# Altium PCB PCB_Wattimetro.PcbDoc
Units mm, origin at the board's own origin, x right, y up, seen from the top; angles counter-clockwise.
Board outline 89.41 x 101.09 mm, 2 copper layers (Top Layer, Bottom Layer); 27 components, 22 nets, 125 pads, 0 vias.
Unrouted connection lines stored in the file: 6.
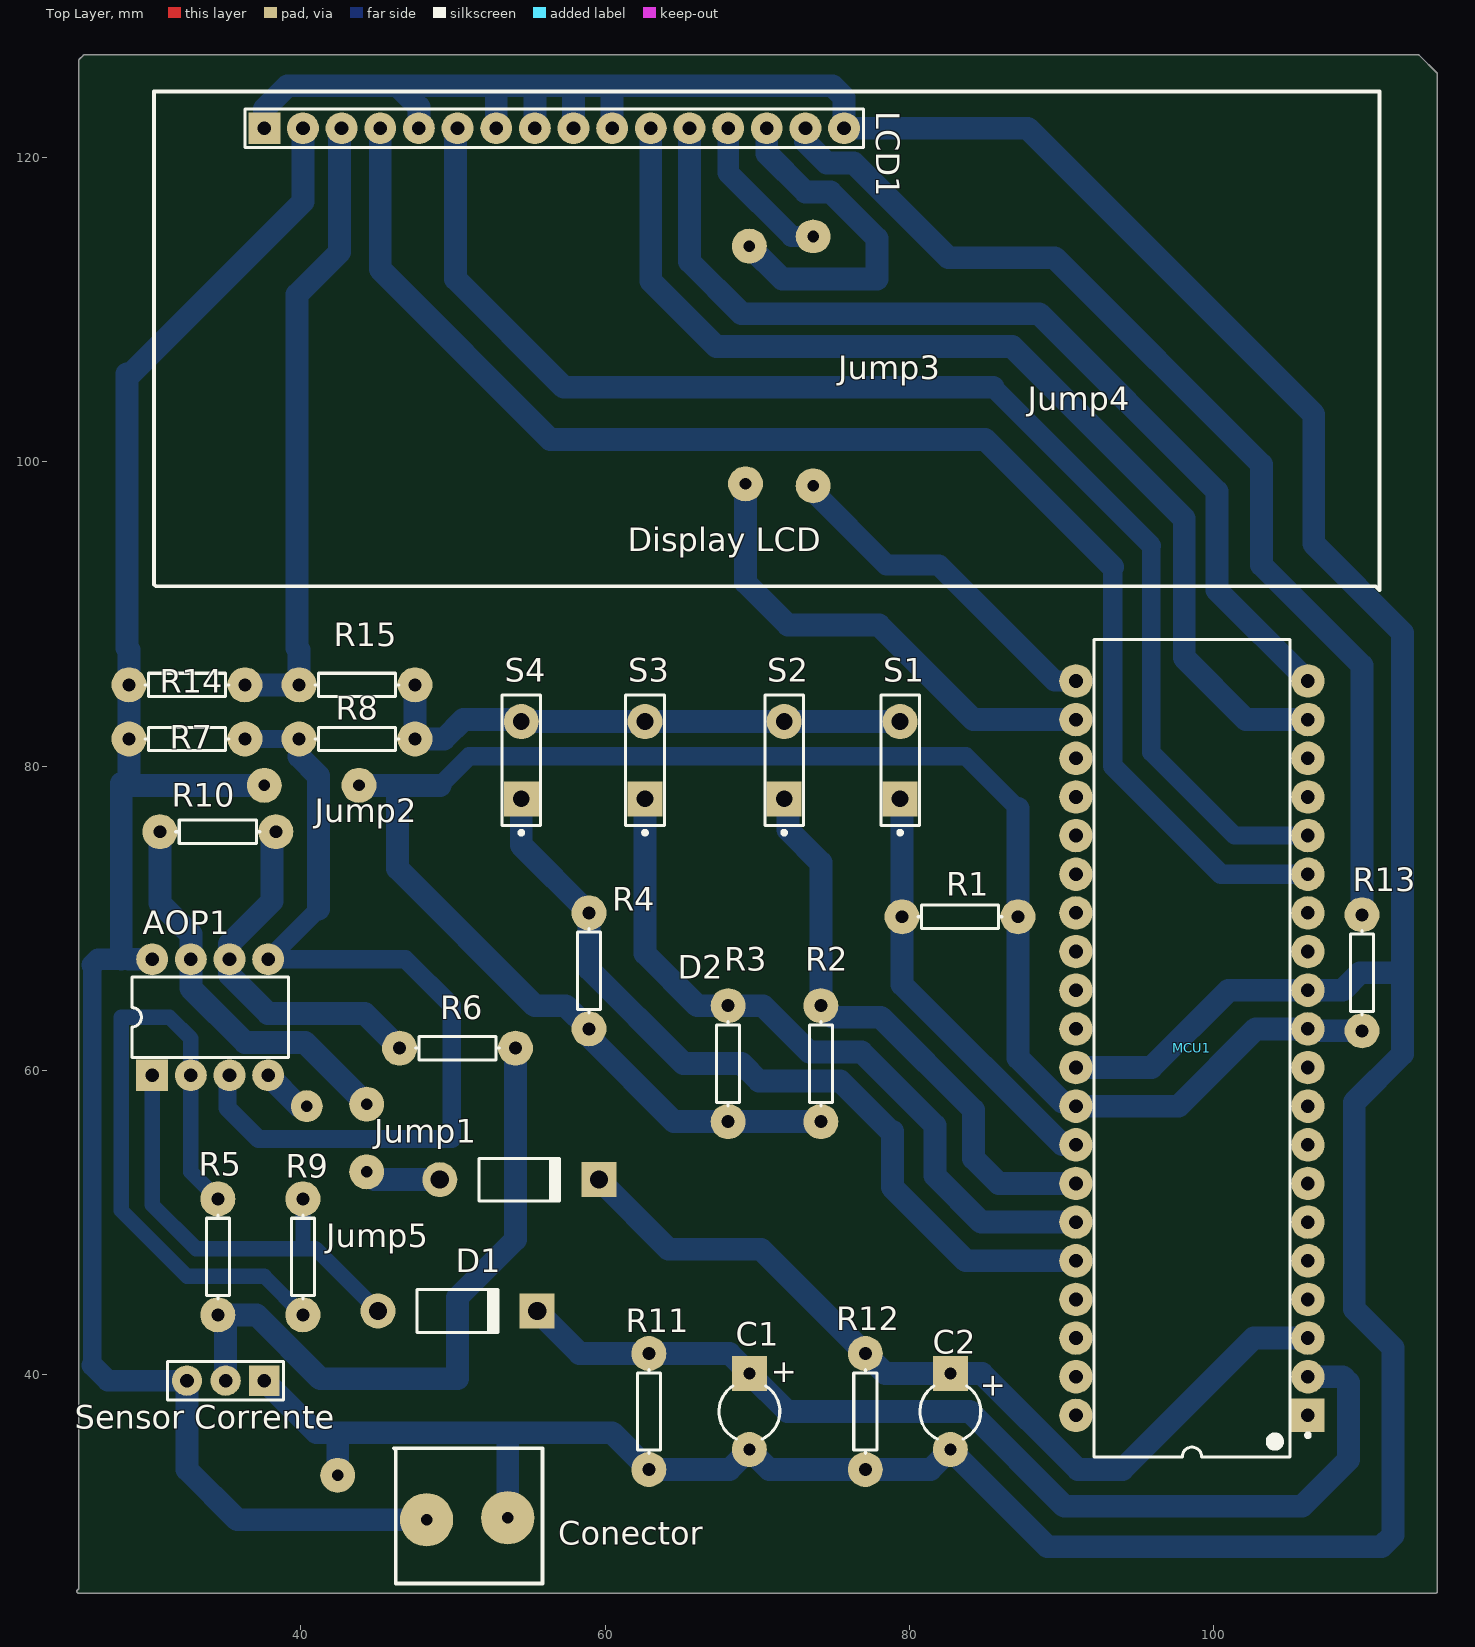
[diagram p0: Top Layer view]
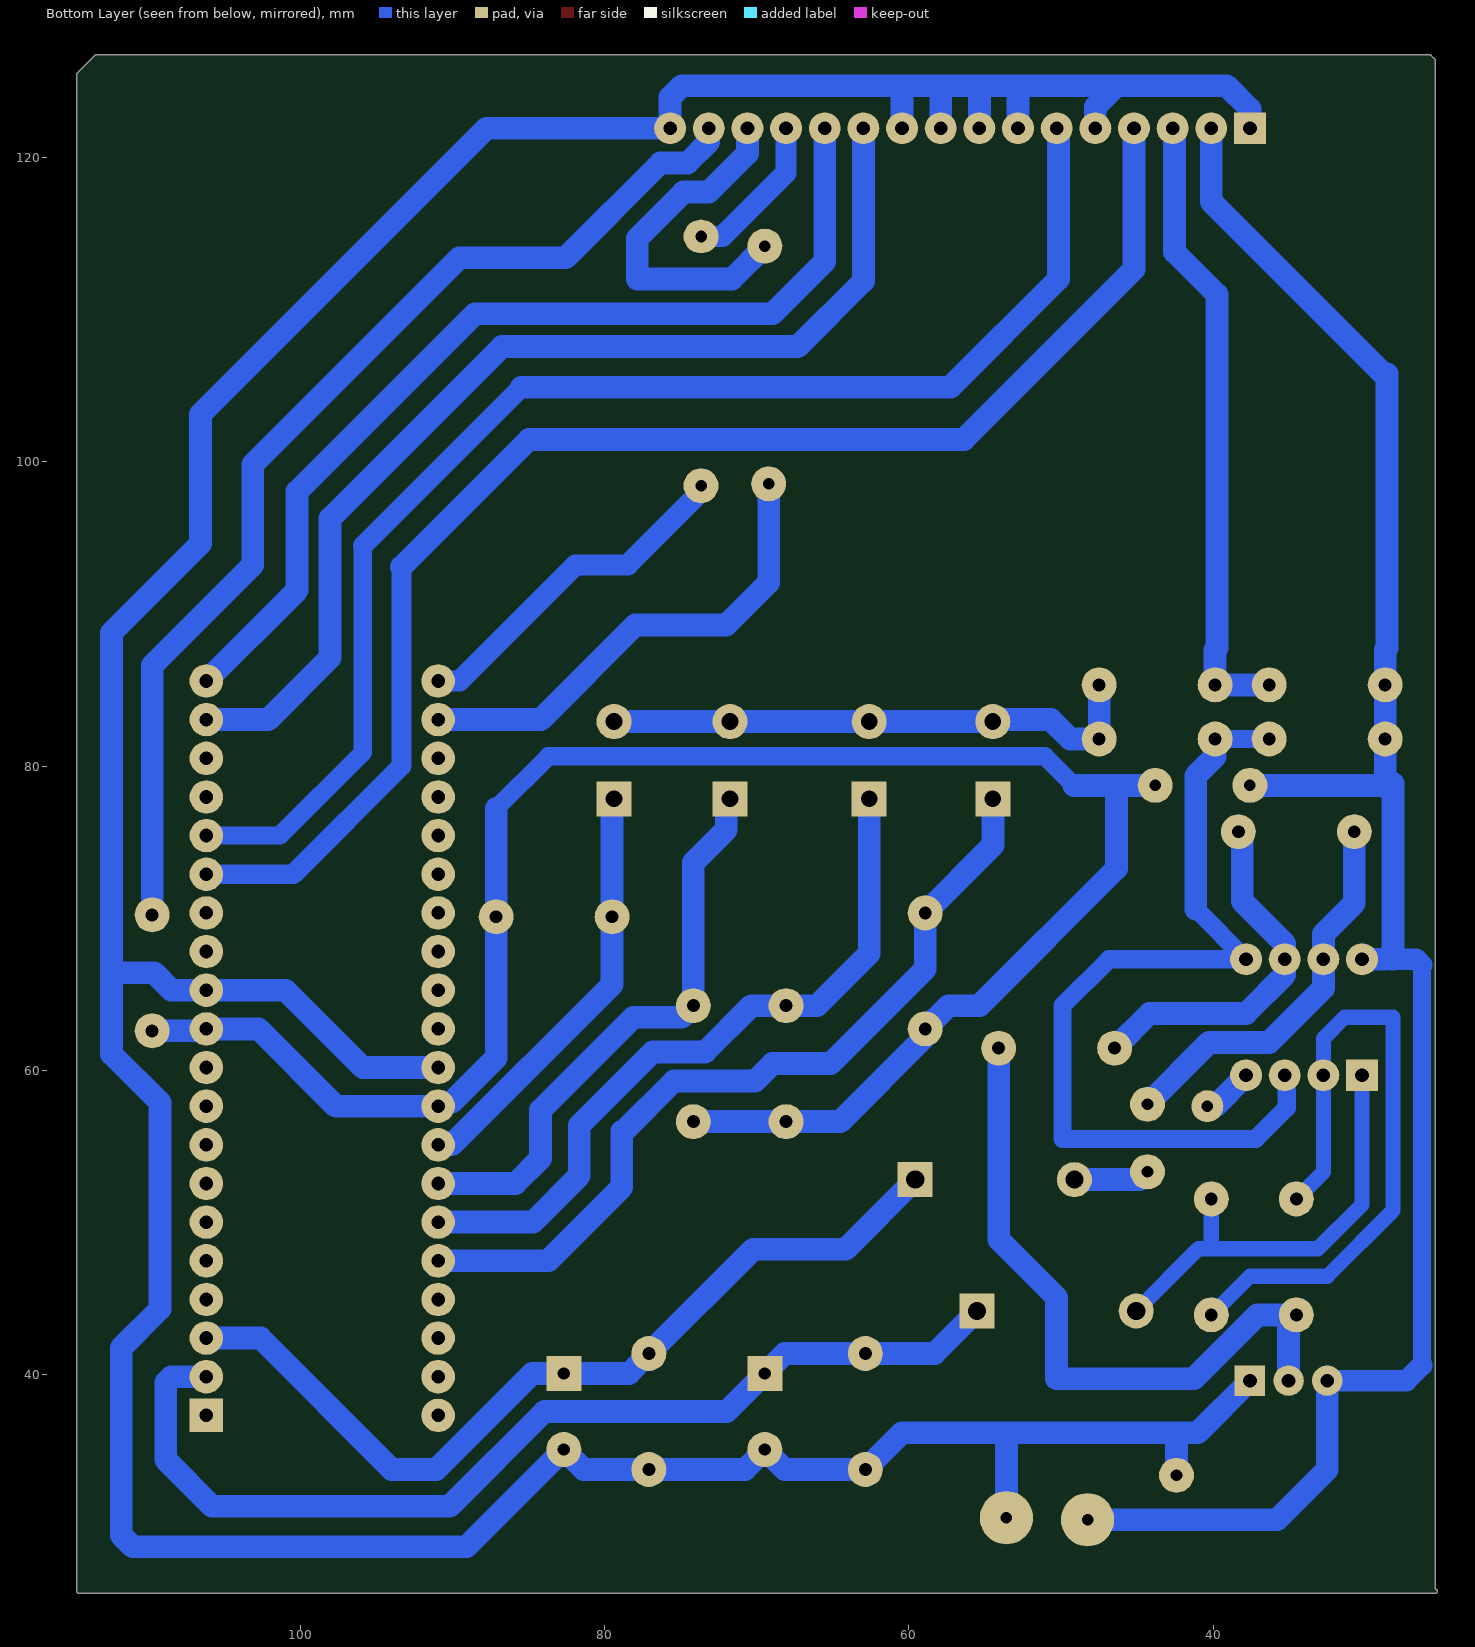
[diagram p1: Bottom Layer view, seen from below]

## Layer stack, top to bottom
Top Layer: signal copper 0.0356
Dielectric: dielectric 0.32, FR-4, Dk 4.8
Bottom Layer: signal copper 0.0356

## Board outline
25.4,25.908 25.4,126.365 cw(c25.527,126.365) 25.437,126.456 25.437,126.455 25.691,126.709 25.69,126.709 cw(c25.781,126.619) 25.781,126.746 113.411,126.746 cw(c113.411,126.619) 113.502,126.709 113.501,126.709 114.644,125.566 114.644,125.567 cw(c114.554,125.476) 114.681,125.476 114.681,25.781 cw(c114.554,25.781) 114.554,25.654 25.4,25.654 cw(c25.4,25.781)

## Design rules (kind name [scope] priority, off if disabled: settings)
Clearance [All] p1: gap=0.254
PolygonConnect [All] p1: connectstyle=Relief reliefconductorwidth=0.254 reliefentries=4 polygonreliefangle="90 Angle"
RoutingLayers [All] p1: top layer_v5=FALSE bottom layer_v5=TRUE
RoutingVias [All] p1: holewidth=0.711 width=1.27 viastyle="Through Hole" minholewidth=0.711 minwidth=1.27 maxholewidth=0.711 maxwidth=1.27
SolderMaskExpansion [All] p1: expansion=0.102
TestPointUsage [All] p1: valid=0 allowmultiple=FALSE
Testpoint [All] p1: side=15 testpointundercomponent=TRUE minsize=1.016 maxsize=2.54 preferedsize=1.524 minholesize=0 maxholesize=1.016 preferedholesize=0.813 testpointgrid=0.025 style=1023 order=0-112345678
Width [All] p1: maxlimit=5 minlimit=0.254 preferedwidth=0.254 toplayer_maxwidth=0.254 minimp=50.000000 maximp=50.000000 favimp=50.000000
18 further rules are at their usual default settings.

## Components (designator, comment, footprint, x,y, rotation, side; value= is the part's Value field where it differs from the comment)
AOP1 "LM358N" 626-05 34.036,63.5 r0 top
C1 "Cap1" CAPR5-4X5 69.469,37.592 r270 top
C2 "Cap2" CAPR5-4X5 82.677,37.592 r270 top
D1 "Diode 1N4007" DO-41 50.292,44.196 r0 top
D2 "Diode 1N4007" DO-41 54.356,52.832 r0 top
LCD1 "Header 16" HDR1X16 37.592,121.92 r0 top
MCU1 "PIC18F4520-I/P" PDIP600-P40 98.552,61.468 r180 top
R1 "Res1" AXIAL-0.3 83.312,70.104 r0 top
R2 "Res2" AXIAL-0.3 74.168,60.452 r270 top
R3 "Res3" AXIAL-0.3 68.072,60.452 r270 top
R4 "Res4" AXIAL-0.3 58.928,66.548 r270 top
R5 "Res5" AXIAL-0.3 34.544,47.752 r90 top
R6 "Res6" AXIAL-0.3 50.292,61.468 r180 top
R7 "Res7" AXIAL-0.3 32.512,81.788 r180 top
R8 "Res8" AXIAL-0.3 43.688,81.788 r180 top
R9 "Res9" AXIAL-0.3 40.132,47.752 r90 top
R10 "Res10" AXIAL-0.3 34.544,75.692 r0 top
R11 "Res11" AXIAL-0.3 62.865,37.592 r90 top
R12 "Res12" AXIAL-0.3 77.089,37.592 r90 top
R13 "Res13" AXIAL-0.3 109.728,66.421 r90 top
R14 "Res14" AXIAL-0.3 32.512,85.344 r180 top
R15 "Res15" AXIAL-0.3 43.688,85.344 r180 top
S1 "SW-PB1" SPST-2 79.375,80.391 r90 top
S2 "SW-PB2" SPST-2 71.755,80.391 r90 top
S3 "SW-PB3" SPST-2 62.611,80.391 r90 top
S4 "SW-PB4" SPST-2 54.483,80.391 r90 top
"Sensor Corrente" "Header 3" HDR1X3 37.592,39.624 r180 top

## Footprints (in the part's own frame and the unit in brackets; to place one, negate y for a bottom-side part, rotate by r counter-clockwise, add the part's x,y. Pads: shape width x height; smd on the part's side, far side on the other; paste and mask are expansions set on the pad)
626-05 [mm] "DIP; 8 Leads; Row Spacing 7.62 mm; Pitch 2.54 mm"
  rect 2.1x2.1 hole 0.9: 1(-3.81,-3.81)
  round 2.1 hole 0.9: 2(-1.27,-3.81) 3(1.27,-3.81) 4(3.81,-3.81) 5(3.81,3.81) 6(1.27,3.81) 7(-1.27,3.81) 8(-3.81,3.81)
  silkscreen extent -5.15,-2.65 5.15,2.65
AXIAL-0.3 [mm] "Resistor; 2 Leads"
  round 2.3 hole 0.85: 1(-3.81,0) 2(3.81,0)
  silkscreen extent -2.77,-0.76 2.77,0.76
CAPR5-4X5 [mm] "Capacitor; 2 Leads"
  rect 2.3x2.3 hole 0.8: 1(-2.5,0)
  round 2.3 hole 0.8: 2(2.5,0)
  silkscreen extent -1.69,-2 1.82,2
DO-41 [mm] "Diode, Axial; Body 5.2 x 2.7 mm (LxDia. max), Lead Dia. 0.86 mm (max)"
  round 2.3 hole 1.2: 1(-5.23,0)
  rect 2.3x2.3 hole 1.2: 2(5.23,0)
  silkscreen extent -2.65,-1.4 2.75,1.42
HDR1X3 [mm] "Connector; Header; 3 Position"
  rect 2x2 hole 0.9: 1(0,0)
  round 2 hole 0.9: 2(2.54,0) 3(5.08,0)
  silkscreen extent -1.27,-1.27 6.35,1.27
HDR1X16 [mm] "Connector; Header; 16 Position"
  rect 2.1x2.1 hole 0.9: 1(0,0)
  round 2.1 hole 0.9: 2(2.54,0) 3(5.08,0) 4(7.62,0) 5(10.16,0) 6(12.7,0) 7(15.24,0) 8(17.78,0) 9(20.32,0) 10(22.86,0) 11(25.4,0) 12(27.94,0) 13(30.48,0) 14(33.02,0) 15(35.56,0) 16(38.1,0)
  silkscreen extent -1.27,-1.27 39.37,1.27
PDIP600-P40 [mm] "DIP, 40-Leads, Row Spacing 15.24mm, Pitch 2.54mm, Body 51.8x13.5mm"
  rect 2.2x2.2 hole 0.9: 1(-7.62,24.13)
  round 2.2 hole 0.9: 2(-7.62,21.59) 3(-7.62,19.05) 4(-7.62,16.51) 5(-7.62,13.97) 6(-7.62,11.43) 7(-7.62,8.89) 8(-7.62,6.35) 9(-7.62,3.81) 10(-7.62,1.27) 11(-7.62,-1.27) 12(-7.62,-3.81) 13(-7.62,-6.35) 14(-7.62,-8.89) 15(-7.62,-11.43) 16(-7.62,-13.97) 17(-7.62,-16.51) 18(-7.62,-19.05) 19(-7.62,-21.59) 20(-7.62,-24.13) 21(7.62,-24.13) 22(7.62,-21.59) 23(7.62,-19.05) 24(7.62,-16.51) 25(7.62,-13.97) 26(7.62,-11.43) 27(7.62,-8.89) 28(7.62,-6.35) 29(7.62,-3.81) 30(7.62,-1.27) 31(7.62,1.27) 32(7.62,3.81) 33(7.62,6.35) 34(7.62,8.89) 35(7.62,11.43) 36(7.62,13.97) 37(7.62,16.51) 38(7.62,19.05) 39(7.62,21.59) 40(7.62,24.13)
  silkscreen extent -7.75,-26.85 6.45,26.85, body extent -7.3,-26.85 7.3,26.85, height 6.35
SPST-2 [mm] "Circuit Breaker; 2 Leads"
  rect 2.3x2.3 hole 1.1: 1(-2.54,0)
  round 2.3 hole 1.1: 2(2.54,0)
  silkscreen extent -4.89,-1.27 4.28,1.27

## Part data
AOP1: "Dual Low-Power Operational Amplifier"
C1 C2: library part "Cap Pol1", "Polarized Capacitor (Radial)"
D1 D2: library part Diode, "Default Diode"
LCD1: "Header, 16-Pin"
MCU1: "Enhanced Flash Microcontroller with 10-Bit A/D and nanoWatt Technology, 32K Flash, 40-Pin PDIP, Industrial Temperature Range"
R1: "Resistor"
R2 R3 R4 R5 R6 R7 R8 R9 R10 R11 R12 R13 R14 R15: library part Res1, "Resistor"
S1 S2 S3 S4: library part SW-PB, "Switch"
"Sensor Corrente": "Header, 3-Pin"

## Free pads (board coordinates)
  round 3.5 hole 0.762: 12(48.26,30.48) 13(53.594,30.607)
  round 2.3 hole 0.762: Jump1(44.323,53.34) Jump1(44.323,57.785) Jump2(37.592,78.74) Jump2(43.815,78.74) Jump3(69.215,98.552) Jump3(69.469,114.173) Jump4(73.66,98.425) Jump5(42.418,33.401)
  oval 2.3x2.2 hole 0.762: Jump4(73.66,114.808)
  round 2.1 hole 0.762: Jump5(40.386,57.658)

## Nets (pads, with @x,y where several pads share a name; then routed paths per layer and width w, separated by ;. In a path a pad name is that pad's centre, name@x,y a point inside that pad or via, vN(x,y) a via of type N, cw(c..) or ccw(c..) an arc to the next point about the centre after c; other vN are vias at no path point)
GND: "Sensor Corrente.1" AOP1.4 C1.2 C2.2 LCD1.1 LCD1.5 LCD1.7 LCD1.8 LCD1.9 LCD1.10 LCD1.16 MCU1.12 MCU1.31 pad.13 pad.Jump5 R8.1 R11.1 R12.1 R15.1 S1.2 S2.2 S3.2 S4.2 | length 328
  Bottom Layer w0.254: R8.1@47.498,82.804 47.625,82.931 ; LCD1.5@48.006,121.92 LCD1.5@48.26,121.666 ; 53.467,36.195 53.594,36.068 ; 86.106,121.92 86.36,121.92 ; MCU1.12@105.918,65.278 MCU1.12 MCU1.12@106.426,65.024
  Bottom Layer w1.5: 37.592,39.624 41.021,36.195 42.418,36.195 ; LCD1.1 37.592,123.19 39.116,124.714 46.355,124.714 ; AOP1.4 39.878,57.658 pad.Jump5@40.386,57.658 ; pad.Jump5@42.418,33.401 42.418,36.195 ; R15.1 R8.1 49.403,81.788 50.673,83.058 S4.2@54.229,83.058 ; LCD1.5 47.752,123.317 46.355,124.714 ; LCD1.7 52.832,124.587 52.705,124.714 ; pad.13 53.594,36.068 ; S4.2 S3.2 S2.2 S1.2 ; LCD1.8 55.372,124.587 55.499,124.714 ; LCD1.9 57.912,124.587 58.039,124.714 ; LCD1.10 60.452,124.714 ; 72.898,124.714 60.452,124.714 ; 73.152,124.714 74.93,124.714 75.692,123.952 LCD1.16 ; MCU1.31 95.885,60.198 100.965,65.278 MCU1.12 108.458,65.278 109.601,66.421 112.268,66.421 ; 42.418,36.195 53.467,36.195 60.452,36.195 R11.1 68.159,33.782 C1.2 70.779,33.782 R12.1 81.367,33.782 C2.2 89.067,28.702 110.998,28.702 111.76,29.464 111.76,41.783 109.22,44.323 109.22,57.912 112.395,61.087 112.395,88.773 106.553,94.615 106.553,103.124 87.757,121.92 86.36,121.92 LCD1.16@75.819,121.92 ; 46.355,124.714 52.705,124.714 ; 52.705,124.714 55.499,124.714 ; 55.499,124.714 58.039,124.714 ; 58.039,124.714 60.452,124.714 ; LCD1.16 LCD1.16@75.819,121.92 ; LCD1.16 LCD1.16@75.819,121.92
NetAOP1_1: AOP1.1 D1.1 R9.2 | length 29.4
  Bottom Layer w1: AOP1.1 30.226,51.181 33.114,48.293 40.965,48.293 D1.1 ; 40.132,48.42 R9.2
NetAOP1_2: AOP1.2 R5.2 R9.1 | length 43.9
  Bottom Layer w1: R5.2 32.766,53.34 AOP1.2 32.766,62.103 31.369,63.5 28.194,63.5 28.194,50.8 32.512,46.482 37.592,46.482 R9.1
NetAOP1_3: AOP1.3 AOP1.5 R7.1 R8.2 | length 59
  Bottom Layer w0.254: AOP1.3 AOP1.3@35.433,59.563 ; 49.53,64.897 49.657,64.77
  Bottom Layer w1.2: AOP1.3 35.179,59.563 35.179,57.531 37.211,55.499 49.911,55.499 49.911,64.262 46.863,67.31 AOP1.5 41.148,70.612 ; R7.1 R8.2
  Bottom Layer w1.5: R8.2@39.878,80.645 41.148,79.375 41.148,70.612
NetAOP1_6: AOP1.6 R6.2 R10.2 | length 23.8
  Bottom Layer w0.254: R10.2@38.1,75.438 R10.2
  Bottom Layer w1.5: R10.2@38.1,75.438 38.1,71.12 35.306,68.326 AOP1.6 35.306,66.294 37.846,63.754 44.196,63.754 R6.2
NetAOP1_7: AOP1.7 D2.1 pad.Jump1 R10.1 | length 30.9
  Bottom Layer w0.254: pad.Jump1@44.323,53.34 pad.Jump1@44.831,52.832
  Bottom Layer w1.5: R10.1 30.734,70.993 32.766,68.961 AOP1.7 32.766,65.405 36.322,61.849 40.259,61.849 pad.Jump1@44.323,57.785 ; pad.Jump1@44.831,52.832 D2.1
NetC1_1: C1.1 D1.2 MCU1.2 R11.2 | length 68.2
  Bottom Layer w0.254: MCU1.2 MCU1.2@106.553,39.878
  Bottom Layer w1.5: D1.2 58.316,41.402 R11.2 68.159,41.402 C1.1 71.969,37.592 83.947,37.592 90.17,31.369 105.791,31.369 108.839,34.417 108.839,39.497 108.458,39.878 MCU1.2
NetC2_1: C2.1 D2.2 MCU1.3 R12.2 | length 59.8
  Bottom Layer w0.254: 104.394,42.418 MCU1.3
  Bottom Layer w1.5: D2.2 64.158,48.26 70.231,48.26 R12.2 78.399,40.092 C2.1 84.749,40.092 91.059,33.782 93.98,33.782 102.616,42.418 MCU1.3
NetLCD1_3: LCD1.3 R14.1 R15.2 | length 41.4
  Bottom Layer w1.5: R14.1 R15.2 ; R15.2@39.751,85.217 R15.2 ; LCD1.3@42.545,121.793 42.545,113.792 39.751,110.998 39.751,87.757 39.878,87.63 R15.2
NetLCD1_4: LCD1.4 MCU1.15 | length 94.4
  Bottom Layer w1.3: 93.345,93.091 93.345,80.01 100.457,72.898 MCU1.15
  Bottom Layer w1.5: LCD1.4 45.212,112.649 56.388,101.473 84.963,101.473 93.345,93.091
NetLCD1_6: LCD1.6 MCU1.16 | length 89.1
  Bottom Layer w1.2: 95.885,94.488 95.885,80.899 101.346,75.438 MCU1.16
  Bottom Layer w1.3: 85.471,104.902 95.885,94.488
  Bottom Layer w1.5: LCD1.6 50.165,121.793 50.165,112.014 57.277,104.902 85.471,104.902
NetLCD1_11: LCD1.11 MCU1.19 | length 70.5
  Bottom Layer w1.5: LCD1.11 62.992,111.887 67.31,107.569 86.741,107.569 98.044,96.266 98.044,87.122 102.108,83.058 MCU1.19
NetLCD1_12: LCD1.12 MCU1.20 | length 64.9
  Bottom Layer w0.254: 100.203,93.98 100.203,94.234
  Bottom Layer w1.5: LCD1.12 65.532,113.157 68.961,109.728 88.519,109.728 100.203,98.044 100.203,93.98 100.203,91.567 MCU1.20
NetLCD1_13: LCD1.13 MCU1.21 pad.Jump4 | length 32.7
  Bottom Layer w1.4: LCD1.13 68.072,118.999 72.263,114.808 pad.Jump4@73.66,114.808 ; pad.Jump4@73.66,98.044 78.486,93.218 81.915,93.218 89.535,85.598 MCU1.21
NetLCD1_14: LCD1.14 MCU1.22 pad.Jump3 | length 55.1
  Bottom Layer w1.5: pad.Jump3@69.215,98.552 69.215,92.075 72.009,89.281 77.978,89.281 84.201,83.058 MCU1.22 ; pad.Jump3@69.469,114.173 71.628,112.014 77.851,112.014 77.851,114.681 74.803,117.729 73.152,117.729 70.612,120.269 LCD1.14
NetLCD1_15: LCD1.15 R13.2 | length 72
  Bottom Layer w1.5: LCD1.15 73.152,121.031 74.549,119.634 76.327,119.634 82.55,113.411 89.535,113.411 103.124,99.822 103.124,93.218 109.728,86.614 R13.2
NetMCU1_33: MCU1.33 R1.1 S1.1 | length 28.2
  Bottom Layer w0.254: S1.1@79.248,77.978 S1.1 S1.1@79.502,77.724
  Bottom Layer w1.5: S1.1@79.502,77.724 R1.1 79.502,65.659 90.043,55.118 MCU1.33
NetMCU1_34: MCU1.34 R2.1 S2.1 | length 37.9
  Bottom Layer w0.254: R2.1 R2.1@74.422,64.008
  Bottom Layer w1.5: S2.1@72.009,77.851 72.009,75.819 74.168,73.66 R2.1 ; R2.1@74.422,64.008 74.93,63.5 78.105,63.5 84.201,57.404 84.201,54.229 85.852,52.578 MCU1.34
NetMCU1_35: MCU1.35 R3.1 S3.1 | length 47.7
  Bottom Layer w1.5: S3.1 62.611,67.691 66.04,64.262 R3.1 70.358,64.262 73.406,61.214 76.835,61.214 81.661,56.388 81.661,53.086 84.709,50.038 MCU1.35
NetMCU1_36: MCU1.36 R4.1 S4.1 | length 55.1
  Bottom Layer w0.254: 78.74,56.007 78.867,56.007
  Bottom Layer w1.5: S4.1 54.483,74.803 R4.1 58.928,66.675 65.151,60.452 68.961,60.452 70.104,59.309 75.438,59.309 78.74,56.007 ; 78.867,56.007 78.867,52.324 83.693,47.498 MCU1.36
NetR5_1: "Sensor Corrente.2" R5.1 R6.1 | length 45.3
  Bottom Layer w0.254: R5.1 R5.1@35.052,43.434
  Bottom Layer w1.5: R5.1 37.084,43.942 41.275,39.751 50.292,39.751 50.292,45.085 54.102,48.895 R6.1 ; 35.052,39.624 R5.1@35.052,43.434
VCC: "Sensor Corrente.3" AOP1.8 LCD1.2 MCU1.11 MCU1.32 pad.12 pad.Jump2 R1.2 R2.2 R3.2 R4.2 R7.2 R13.1 R14.2 | length 256.8
  Bottom Layer w0.254: 26.162,67.31 26.67,67.31 ; 28.702,78.867 28.829,78.74 ; AOP1.8@30.076,67.46 AOP1.8 ; pad.Jump2@43.815,78.486 pad.Jump2@43.815,78.74 ; R4.2@58.928,62.23 R4.2 ; MCU1.11 MCU1.11@106.299,62.611
  Bottom Layer w1.2: 26.289,40.64 26.289,66.929 ; 49.149,78.74 51.054,80.645 83.693,80.645 87.122,77.216
  Bottom Layer w1.4: 26.289,40.64 27.305,39.624 32.512,39.624 ; 26.289,66.929 26.67,67.31 28.702,67.31
  Bottom Layer w1.5: 28.194,67.31 28.194,78.867 ; 28.575,87.757 28.575,105.791 28.829,105.791 40.132,117.094 LCD1.2 ; 28.702,67.31 AOP1.8 ; 28.702,78.867 28.702,82.804 28.702,87.63 ; 28.829,78.74 pad.Jump2@37.592,78.74 ; 32.512,39.624 32.512,33.782 35.814,30.48 pad.12 ; pad.Jump2@43.815,78.74 46.355,78.74 ; 49.149,78.74 46.355,78.74 ; R4.2@58.928,62.23 64.516,56.642 R3.2 R2.2 ; R4.2 57.404,64.262 55.372,64.262 46.355,73.279 46.355,78.74 ; 87.122,77.216 R1.2 87.122,60.833 MCU1.32@90.043,57.912 ; MCU1.32 97.663,57.658 102.743,62.738 MCU1.11 ; MCU1.11@106.299,62.611 R13.1
pads on no net: MCU1.1 MCU1.4 MCU1.5 MCU1.6 MCU1.7 MCU1.8 MCU1.9 MCU1.10 MCU1.13 MCU1.14 MCU1.17 MCU1.18 MCU1.23 MCU1.24 MCU1.25 MCU1.26 MCU1.27 MCU1.28 MCU1.29 MCU1.30 MCU1.37 MCU1.38 MCU1.39 MCU1.40

## Silkscreen, mask and mechanical layers (free items; w line width, h text height)
Top Overlay:
  lines w0.254: 30.353,91.948 30.48,91.821 110.617,91.821 110.871,91.567 110.871,124.333 30.353,124.333 30.353,94.361 30.353,91.948 ; 46.101,35.179 46.228,35.052 46.228,34.671 46.228,26.289 55.88,26.289 55.88,35.179 46.101,35.179
  text "Jump3" at 75.311,105.41 h1.52
  text "Jump4" at 87.757,103.378 h1.52
  text "Display LCD" at 61.468,94.107 h1.52
  text "Jump2" at 40.894,76.327 h1.52
  text "Jump1" at 44.831,55.245 h1.52
  text "Jump5" at 41.656,48.387 h1.52
  text "Conector" at 56.896,28.829 h1.52

## Text inside footprints (layer, text, board x,y; h text height)
C1: Top Overlay "+" at 71.12,41.021 h1.5 r270
C2: Top Overlay "+" at 84.836,40.132 h1.5 r270